# Altium PCB 0084 - AR Display Board Rev2.1.PcbDoc (part 3 of 3)
Units mm, origin at the board's own origin, x right, y up, seen from the top; angles counter-clockwise.
Board outline 127.7 x 27.2 mm, 4 copper layers (L1-TOP, L2-GND, L3-GND, L4-BOT), stack 1.571 mm thick; 141 components, 141 nets, 671 pads, 447 vias.
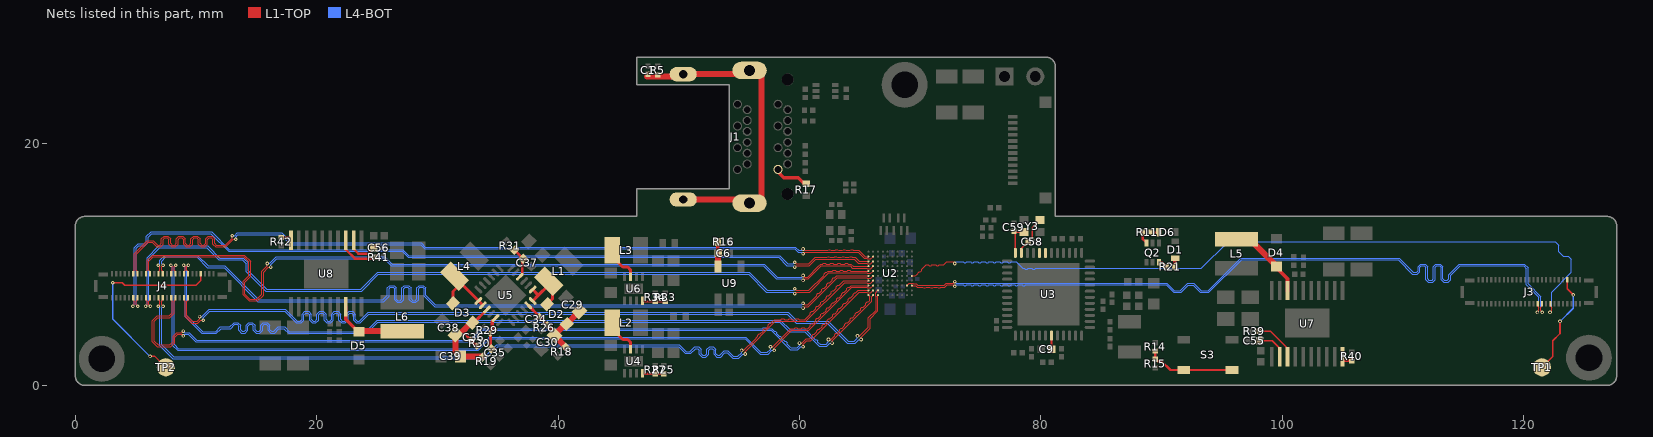
[diagram p5: the nets of this part, all layers, seen from the top]

## Via types
v1: diameter 0.3, hole 0.15, L1-TOP to L4-BOT, tented both sides, 445 vias
v2: diameter 0.25, hole 0.1, L1-TOP to L4-BOT, tented both sides, 2 vias

## Nets (pads, with @x,y where several pads share a name; then routed paths per layer and width w, separated by ;. In a path a pad name is that pad's centre, name@x,y a point inside that pad or via, vN(x,y) a via of type N, cw(c..) or ccw(c..) an arc to the next point about the centre after c; other vN are vias at no path point) (continued)
MIPI_DSI01_3_P: J3.35 U2.F10 | length 63.9
  L1-TOP w0.076: U2.F10@69.3,9.075 69.591,9.075 69.698,9.183 69.914,9.398 70.022,9.398 70.129,9.506 70.129,9.614 70.345,9.829 70.516,10 70.668,10 70.744,9.924 70.897,9.924 70.973,10 71.278,10 71.354,9.924 71.506,9.924 71.582,10 71.8,10 71.96,10 72.184,10.224 72.736,10.224 v1(72.86,10.1) ; v1@122.187,6.05 v1(122.175,6.05) 122.299,6.174 122.299,6.476 122.2,6.575 J3.35@122.2,6.75
  L4-BOT w0.076: v1(72.86,10.1) 72.984,10.224 73.1,10.224 73.252,10.224 73.557,10.224 73.633,10.148 73.786,10.148 73.862,10.224 74.167,10.224 74.243,10.148 74.395,10.148 74.472,10.224 74.776,10.224 74.853,10.148 75.005,10.148 75.081,10.224 75.386,10.224 75.462,10.148 75.615,10.148 75.691,10.224 75.996,10.224 76.072,10.148 76.224,10.148 76.3,10.224 76.605,10.224 76.681,10.148 76.834,10.148 76.91,10.224 77.215,10.224 77.291,10.148 77.443,10.148 77.52,10.224 77.824,10.224 77.961,10.224 78.484,9.7 78.637,9.7 78.713,9.624 78.865,9.624 78.942,9.7 79.246,9.7 79.323,9.624 79.475,9.624 79.551,9.7 79.6,9.7 93.3,9.7 95.5,11.9 122.6,11.9 122.9,11.6 122.9,11.084 123.284,10.7 123.684,10.7 123.948,10.437 123.948,9.376 122.299,7.727 122.299,6.174 v1(122.175,6.05)
MIPI_DSI01_C_N: J3.31 U2.H9 | length 64
  L1-TOP w0.076: U2.H9@68.9,8.275 69.1,8.475 69.383,8.475 69.43,8.427 69.673,8.427 69.8,8.3 71.984,8.3 72.161,8.476 72.736,8.476 v1(72.86,8.6) ; J3.31@121.5,6.75 121.5,6.575 121.401,6.476 121.401,6.174 v1(121.525,6.05) v1@121.513,6.05
  L4-BOT w0.076: v1(72.86,8.6) 72.984,8.476 90.439,8.476 91.063,7.852 91.552,7.852 92.152,8.452 92.663,8.452 93.263,7.852 93.852,7.852 96.552,10.552 109.663,10.552 ; 109.678,10.552 109.663,10.552 ; v1(121.525,6.05) 121.401,6.174 121.401,7.35 120.351,8.4 120.351,9.739 120.041,10.05 114.657,10.05 113.781,9.174 113.781,8.824 113.667,8.71 113.413,8.71 113.299,8.824 113.299,9.841 113.095,10.045 112.715,10.045 112.511,9.841 112.511,8.824 112.397,8.71 112.143,8.71 112.029,8.824 112.029,9.841 111.825,10.045 111.445,10.045 111.241,9.841 111.241,9.492 111.127,9.377 110.838,9.377 109.663,10.552
MIPI_DSI01_C_P: J3.29 U2.H10 | length 63.9
  L1-TOP w0.076: U2.H10@69.3,8.275 69.609,8.275 69.737,8.148 69.889,8.148 70.194,8.148 70.27,8.071 70.423,8.071 70.499,8.148 70.804,8.148 70.88,8.071 71.032,8.071 71.108,8.148 71.413,8.148 71.489,8.071 71.642,8.071 71.718,8.148 72.023,8.148 72.048,8.148 72.224,8.324 72.736,8.324 v1(72.86,8.2) ; v1@121.137,6.05 v1(121.125,6.05) 121.249,6.174 121.249,6.476 121.15,6.575 J3.29@121.15,6.75
  L4-BOT w0.076: v1(72.86,8.2) 72.984,8.324 73.1,8.324 73.252,8.324 73.557,8.324 73.633,8.248 73.786,8.248 73.862,8.324 74.167,8.324 74.243,8.248 74.395,8.248 74.472,8.324 74.776,8.324 74.853,8.248 75.005,8.248 75.081,8.324 75.386,8.324 75.462,8.248 75.615,8.248 75.691,8.324 75.996,8.324 76.072,8.248 76.224,8.248 76.3,8.324 76.605,8.324 76.681,8.248 76.834,8.248 76.91,8.324 77.215,8.324 77.291,8.248 77.443,8.248 77.52,8.324 77.824,8.324 77.901,8.248 78.053,8.248 78.129,8.324 78.434,8.324 78.51,8.248 78.663,8.248 78.739,8.324 90.376,8.324 91,7.7 91.616,7.7 92.216,8.3 92.6,8.3 93.2,7.7 93.916,7.7 96.616,10.4 109.6,10.4 110.775,9.225 111.19,9.225 111.394,9.428 111.394,9.778 111.508,9.892 111.762,9.892 111.876,9.778 111.876,8.761 112.08,8.558 112.46,8.558 112.664,8.761 112.664,9.778 112.778,9.892 113.032,9.892 113.146,9.778 113.146,8.761 113.35,8.558 113.73,8.558 113.934,8.761 113.934,9.111 114.72,9.898 119.977,9.898 120.199,9.676 120.199,8.337 121.249,7.287 121.249,6.174 v1(121.125,6.05)
MIPI_DSI10_0_N: J4.11 U2.C1 | length 69.1
  L1-TOP w0.076: v1@4.787,6.55 v1(4.775,6.55) 4.899,6.674 4.899,6.976 4.8,7.075 J4.11@4.8,7.25 ; v1(59.6,10.2) 59.724,10.076 60.761,10.076 61.284,10.6 62.1,10.6 62.252,10.6 62.329,10.676 62.481,10.676 62.557,10.6 62.862,10.6 62.938,10.676 63.091,10.676 63.167,10.6 63.472,10.6 63.548,10.676 63.7,10.676 63.776,10.6 64.081,10.6 64.157,10.676 64.31,10.676 64.386,10.6 64.616,10.6 64.941,10.275 U2.C1@65.7,10.275
  L4-BOT w0.076: v1(4.775,6.55) 4.899,6.674 4.899,11.414 5.212,11.727 5.712,11.727 5.898,11.913 5.898,12.338 6.287,12.727 11.288,12.727 12.763,11.252 27.138,11.252 27.638,10.752 58.348,10.752 59.024,10.076 59.476,10.076 v1(59.6,10.2)
MIPI_DSI10_0_P: J4.13 U2.C2 | length 69.1
  L1-TOP w0.076: J4.13@5.15,7.25 5.15,7.075 5.051,6.976 5.051,6.674 v1(5.175,6.55) v1@5.163,6.55 ; v1(59.6,9.8) 59.724,9.924 60.824,9.924 61.348,10.448 64.552,10.448 64.877,10.123 65.57,10.123 65.617,10.075 65.9,10.075 U2.C2@66.1,10.275
  L4-BOT w0.076: v1(5.175,6.55) 5.051,6.674 5.051,11.351 5.275,11.575 5.775,11.575 6.05,11.85 6.05,12.275 6.35,12.575 11.225,12.575 12.7,11.1 27.075,11.1 27.575,10.6 58.284,10.6 58.961,9.924 59.476,9.924 v1(59.6,9.8)
MIPI_DSI10_1_N: J4.17 U2.E1 | length 69.1
  L1-TOP w0.076: v1@5.837,6.55 v1(5.825,6.55) 5.949,6.674 5.949,6.976 5.85,7.075 J4.17@5.85,7.25 ; v1(59.6,8) 59.724,7.876 60.776,7.876 62,9.1 62.052,9.152 62.052,9.259 62.159,9.367 62.267,9.367 62.375,9.475 62.414,9.475 62.719,9.475 62.795,9.551 62.947,9.551 63.024,9.475 63.328,9.475 63.405,9.551 63.557,9.551 63.633,9.475 63.938,9.475 64.014,9.551 64.167,9.551 64.243,9.475 64.548,9.475 64.7,9.475 U2.E1@65.7,9.475
  L4-BOT w0.076: v1(5.825,6.55) 5.949,6.674 5.949,10.564 6.937,11.552 10.963,11.552 11.963,10.552 13.913,10.552 14.325,10.141 14.325,9.491 15.863,7.952 23.652,7.952 25.052,9.352 55.848,9.352 57.324,7.876 59.476,7.876 v1(59.6,8)
MIPI_DSI10_1_P: J4.19 U2.E2 | length 69.1
  L1-TOP w0.076: J4.19@6.2,7.25 6.2,7.075 6.101,6.976 6.101,6.674 v1(6.225,6.55) v1@6.213,6.55 ; v1(59.6,7.6) 59.724,7.724 60.839,7.724 62.438,9.323 65.57,9.323 65.617,9.275 65.9,9.275 U2.E2@66.1,9.475
  L4-BOT w0.076: v1(6.225,6.55) 6.101,6.674 6.101,10.501 7,11.4 10.9,11.4 11.9,10.4 13.85,10.4 14.173,10.077 14.173,9.427 15.8,7.8 23.716,7.8 25.116,9.2 55.784,9.2 57.261,7.724 59.476,7.724 v1(59.6,7.6)
MIPI_DSI10_2_N: J4.24 U2.F1 | length 69.1
  L1-TOP w0.076: v1@6.887,9.95 v1(6.875,9.95) 6.999,9.826 6.999,9.524 6.9,9.425 J4.24@6.9,9.25 ; v1(60.3,6.8) 60.424,6.676 60.676,6.676 61.3,7.3 61.408,7.408 61.408,7.516 61.516,7.623 61.623,7.623 61.839,7.839 61.839,7.947 61.947,8.054 62.054,8.054 62.27,8.27 62.27,8.378 62.378,8.485 62.485,8.485 62.701,8.701 62.701,8.809 62.809,8.916 62.916,8.916 63,9 63.075,9.075 U2.F1@65.7,9.075
  L4-BOT w0.076: v1(6.875,9.95) 6.999,10.074 6.999,10.363 7.436,10.8 10.116,10.8 11.016,9.9 12.4,9.9 15.2,7.1 25.485,7.1 25.848,7.462 25.848,8.073 26.049,8.275 26.408,8.275 26.61,8.073 26.61,7.14 26.725,7.025 26.933,7.025 27.067,7.159 27.067,8.073 27.269,8.275 27.627,8.275 27.829,8.073 27.829,7.167 27.971,7.025 28.152,7.025 28.286,7.159 28.286,8.073 28.488,8.275 28.847,8.275 29.048,8.073 29.048,7.462 29.834,6.676 60.176,6.676 v1(60.3,6.8)
MIPI_DSI10_2_P: J4.26 U2.F2 | length 69.1
  L1-TOP w0.076: J4.26@7.25,9.25 7.25,9.425 7.151,9.524 7.151,9.826 v1(7.275,9.95) v1@7.263,9.95 ; v1(60.3,6.4) 60.424,6.524 60.739,6.524 63.138,8.923 65.57,8.923 65.617,8.875 65.9,8.875 U2.F2@66.1,9.075
  L4-BOT w0.076: v1(7.275,9.95) 7.151,10.074 7.151,10.3 7.499,10.648 10.052,10.648 10.952,9.748 12.337,9.748 15.137,6.948 25.549,6.948 26,7.399 26,8.01 26.113,8.123 26.345,8.123 26.457,8.01 26.457,7.077 26.662,6.872 26.996,6.872 27.219,7.096 27.219,8.01 27.332,8.123 27.564,8.123 27.677,8.01 27.677,7.104 27.908,6.872 28.215,6.872 28.439,7.096 28.439,8.01 28.551,8.123 28.783,8.123 28.896,8.01 28.896,7.399 29.771,6.524 60.176,6.524 v1(60.3,6.4)
MIPI_DSI10_3_N: J4.12 U2.B1 | length 69.1
  L1-TOP w0.076: J4.12@4.8,9.25 4.8,9.425 4.899,9.524 4.899,10.914 5.984,12 6.447,12 6.823,11.624 7.004,11.624 7.142,11.762 7.142,12.148 7.37,12.376 7.677,12.376 7.904,12.148 7.904,11.762 8.042,11.624 8.223,11.624 8.361,11.762 8.361,12.148 8.589,12.376 8.896,12.376 9.123,12.148 9.123,11.762 9.262,11.624 9.442,11.624 9.581,11.762 9.581,12.148 9.808,12.376 10.115,12.376 10.343,12.148 10.343,11.762 10.481,11.624 10.662,11.624 10.8,11.762 10.8,12.148 11.027,12.376 11.334,12.376 11.562,12.148 11.562,11.762 11.7,11.624 12.416,11.624 13,12.208 v1(13,12.4) ; v1(60.3,11.3) 60.424,11.176 62.1,11.176 62.333,11.176 62.409,11.252 62.562,11.252 62.638,11.176 62.943,11.176 63.019,11.252 63.171,11.252 63.247,11.176 63.552,11.176 63.628,11.252 63.781,11.252 63.857,11.176 64.162,11.176 64.238,11.252 64.39,11.252 64.467,11.176 64.771,11.176 64.924,11.176 65.425,10.675 U2.B1@65.7,10.675
  L4-BOT w0.076: v1(13,12.4) 13.192,12.4 13.417,12.625 17.091,12.625 17.916,11.8 28.666,11.8 29.013,11.452 59.663,11.452 59.939,11.176 60.176,11.176 v1(60.3,11.3)
MIPI_DSI10_3_P: J4.14 U2.B2 | length 69.1
  L1-TOP w0.076: J4.14@5.15,9.25 5.15,9.425 5.051,9.524 5.051,10.851 6.048,11.848 6.384,11.848 6.76,11.472 7.067,11.472 7.295,11.699 7.295,12.085 7.433,12.224 7.614,12.224 7.752,12.085 7.752,11.699 7.979,11.472 8.286,11.472 8.514,11.699 8.514,12.085 8.652,12.224 8.833,12.224 8.971,12.085 8.971,11.699 9.199,11.472 9.505,11.472 9.733,11.699 9.733,12.085 9.871,12.224 10.052,12.224 10.19,12.085 10.19,11.699 10.418,11.472 10.725,11.472 10.952,11.699 10.952,12.085 11.09,12.224 11.271,12.224 11.409,12.085 11.409,11.699 11.637,11.472 12.479,11.472 13.108,12.1 v1(13.3,12.1) ; v1(60.3,10.9) 60.424,11.024 64.861,11.024 65.362,10.523 65.57,10.523 65.617,10.475 65.9,10.475 U2.B2@66.1,10.675
  L4-BOT w0.076: v1(13.3,12.1) 13.3,12.292 13.48,12.473 17.027,12.473 17.852,11.648 28.602,11.648 28.95,11.3 59.6,11.3 59.876,11.024 60.176,11.024 v1(60.3,10.9)
MIPI_DSI10_C_N: J4.18 U2.D1 | length 69.1
  L1-TOP w0.076: J4.18@5.85,9.25 5.85,9.425 5.949,9.524 5.949,10.349 6.4,10.8 14.016,10.8 14.525,10.291 14.525,9.025 14.052,8.552 14.052,7.563 14.463,7.152 15.052,7.152 15.448,7.548 15.448,9.455 15.9,9.908 v1(15.9,10.1) ; v1(60.3,9.1) 60.424,8.976 60.676,8.976 61.6,9.9 61.708,10.008 61.752,10.052 61.905,10.052 61.981,10.129 62.133,10.129 62.21,10.052 62.514,10.052 62.591,10.129 62.743,10.129 62.819,10.052 63.124,10.052 63.2,10.129 63.353,10.129 63.429,10.052 63.734,10.052 63.81,10.129 63.962,10.129 64.038,10.052 64.2,10.052 64.263,10.052 64.441,9.875 U2.D1@65.7,9.875
  L4-BOT w0.076: v1(15.9,10.1) 16.092,10.1 16.645,10.652 25.648,10.652 26.248,10.052 57.063,10.052 58.139,8.976 60.176,8.976 v1(60.3,9.1)
MIPI_DSI10_C_P: J4.20 U2.D2 | length 69.1
  L1-TOP w0.076: J4.20@6.2,9.25 6.2,9.425 6.101,9.524 6.101,10.286 6.463,10.648 13.952,10.648 14.373,10.227 14.373,9.088 13.9,8.616 13.9,7.5 14.4,7 15.116,7 15.6,7.484 15.6,9.392 16.008,9.8 v1(16.2,9.8) ; v1(60.3,8.7) 60.424,8.824 60.739,8.824 61.816,9.9 64.2,9.9 64.377,9.723 65.57,9.723 65.617,9.675 65.9,9.675 U2.D2@66.1,9.875
  L4-BOT w0.076: v1(16.2,9.8) 16.2,9.992 16.708,10.5 25.584,10.5 26.184,9.9 57,9.9 58.076,8.824 60.176,8.824 v1(60.3,8.7)
MIPI_DSI11_0_N: J4.38 U2.K1 | length 69.1
  L1-TOP w0.076: J4.38@9.35,9.25 9.35,9.425 9.251,9.524 9.251,9.826 v1(9.375,9.95) v1@9.363,9.95 ; v1(62.4,3.8) 62.592,3.8 62.792,4 62.9,4.108 62.9,4.216 63.008,4.323 63.116,4.323 63.331,4.539 63.331,4.647 63.439,4.754 63.547,4.754 63.762,4.97 63.762,5.078 63.87,5.185 63.978,5.185 64.193,5.401 64.193,5.509 64.301,5.616 64.409,5.616 64.624,5.832 64.624,5.94 64.732,6.047 64.84,6.047 65.055,6.263 65.055,6.371 65.163,6.479 65.271,6.479 65.486,6.694 65.486,6.802 65.594,6.91 65.702,6.91 65.8,7.008 65.824,7.032 65.824,7.351 U2.K1@65.7,7.475
  L4-BOT w0.076: v1(9.375,9.95) 9.251,9.826 9.251,5.749 10.548,4.452 11.637,4.452 12.029,4.845 12.8,4.845 13.156,5.201 13.463,5.201 13.691,4.973 13.691,4.627 13.829,4.488 14.01,4.488 14.148,4.627 14.148,4.973 14.375,5.201 14.682,5.201 14.91,4.973 14.91,4.627 15.048,4.488 15.229,4.488 15.367,4.627 15.367,4.973 15.595,5.201 15.901,5.201 16.129,4.973 16.129,4.627 16.267,4.488 16.448,4.488 16.804,4.845 17.355,4.845 17.748,4.452 24.052,4.452 25,5.4 58.416,5.4 59.216,4.6 60.5,4.6 61.308,3.792 61.416,3.792 61.523,3.684 61.523,3.577 61.696,3.404 62.196,3.404 62.4,3.608 v1(62.4,3.8)
MIPI_DSI11_0_P: J4.36 U2.K2 | length 69.1
  L1-TOP w0.076: v1@8.987,9.95 v1(8.975,9.95) 9.099,9.826 9.099,9.524 9,9.425 J4.36@9,9.25 ; v1(62.7,3.5) 62.7,3.692 65.976,6.968 65.976,7.351 U2.K2@66.1,7.475
  L4-BOT w0.076: v1(8.975,9.95) 9.099,9.826 9.099,5.686 10.484,4.3 11.7,4.3 12.092,4.692 12.863,4.692 13.219,5.049 13.4,5.049 13.538,4.91 13.538,4.563 13.766,4.336 14.073,4.336 14.3,4.563 14.3,4.91 14.438,5.049 14.619,5.049 14.757,4.91 14.757,4.563 14.985,4.336 15.292,4.336 15.519,4.563 15.519,4.91 15.658,5.049 15.838,5.049 15.977,4.91 15.977,4.563 16.204,4.336 16.511,4.336 16.867,4.692 17.292,4.692 17.684,4.3 24.116,4.3 25.063,5.248 58.352,5.248 59.152,4.448 60.437,4.448 61.633,3.251 62.259,3.251 62.508,3.5 v1(62.7,3.5)
MIPI_DSI11_1_N: J4.32 U2.H1 | length 69.1
  L1-TOP w0.076: J4.32@8.3,9.25 8.3,9.425 8.201,9.524 8.201,9.826 v1(8.325,9.95) v1@8.313,9.95 ; v1(57.6,3.2) 57.792,3.2 59.292,4.7 59.4,4.7 59.552,4.7 59.629,4.776 59.781,4.776 59.857,4.7 60.162,4.7 60.238,4.776 60.391,4.776 60.467,4.7 60.6,4.7 60.7,4.7 60.8,4.8 60.908,4.908 60.908,5.016 61.016,5.123 61.123,5.123 61.339,5.339 61.339,5.447 61.447,5.554 61.554,5.554 61.77,5.77 61.77,5.878 61.878,5.985 61.985,5.985 62.201,6.201 62.201,6.309 62.309,6.416 62.416,6.416 62.632,6.632 62.632,6.74 62.74,6.847 62.847,6.847 63.063,7.063 63.063,7.171 63.171,7.279 63.279,7.279 63.494,7.494 63.494,7.602 63.602,7.71 63.71,7.71 63.925,7.925 63.925,8.033 64.033,8.141 64.141,8.141 64.275,8.275 64.427,8.275 ; 64.3,8.275 64.427,8.275 ; U2.H1@65.7,8.275 64.427,8.275
  L4-BOT w0.076: v1(8.325,9.95) 8.201,9.826 8.201,9.537 8.2,9.536 8.2,3.4 8.548,3.052 33.337,3.052 34.284,4 55.55,4 56.8,2.75 57.342,2.75 57.6,3.008 v1(57.6,3.2)
MIPI_DSI11_1_P: J4.30 U2.H2 | length 69.1
  L1-TOP w0.076: v1@7.937,9.95 v1(7.925,9.95) 8.049,9.826 8.049,9.524 7.95,9.425 J4.30@7.95,9.25 ; v1(57.9,2.9) 57.9,3.092 59.355,4.548 60.763,4.548 64.338,8.123 65.57,8.123 65.617,8.075 65.9,8.075 U2.H2@66.1,8.275
  L4-BOT w0.076: v1(7.925,9.95) 8.049,9.826 8.049,9.6 8.048,9.599 8.048,3.337 8.484,2.9 33.4,2.9 34.348,3.848 55.487,3.848 56.737,2.598 57.405,2.598 57.708,2.9 v1(57.9,2.9)
MIPI_DSI11_2_N: J4.25 U2.G1 | length 69.1
  L1-TOP w0.076: J4.25@7.25,7.25 7.25,7.075 7.151,6.976 7.151,6.674 v1(7.275,6.55) v1@7.263,6.55 ; v1(55.2,2.9) 55.392,2.9 56.292,3.8 56.544,4.051 56.544,4.159 56.651,4.267 56.759,4.267 56.975,4.483 56.975,4.59 57.083,4.698 57.19,4.698 57.406,4.914 57.406,5.021 57.514,5.129 57.621,5.129 57.837,5.345 57.945,5.452 58.3,5.452 58.452,5.452 58.529,5.529 58.681,5.529 58.757,5.452 59.062,5.452 59.138,5.529 59.291,5.529 59.367,5.452 59.672,5.452 59.748,5.529 59.9,5.529 59.976,5.452 60.2,5.452 60.452,5.452 60.7,5.7 60.906,5.906 60.906,6.014 61.014,6.121 61.121,6.121 61.337,6.337 61.337,6.445 61.445,6.552 61.553,6.552 61.768,6.768 61.768,6.876 61.876,6.984 61.984,6.984 62.199,7.199 62.199,7.307 62.307,7.415 62.415,7.415 62.63,7.63 62.63,7.738 62.738,7.846 62.846,7.846 63.061,8.061 63.061,8.169 63.169,8.277 63.277,8.277 63.492,8.492 63.6,8.6 63.675,8.675 U2.G1@65.7,8.675
  L4-BOT w0.076: v1(7.275,6.55) 7.151,6.426 7.151,3.349 8.148,2.352 33.937,2.352 34.937,3.352 50.048,3.352 50.6,2.8 50.918,2.8 51.325,3.207 51.632,3.207 51.86,2.979 51.86,2.636 51.998,2.498 52.179,2.498 52.317,2.636 52.317,2.979 52.545,3.207 52.852,3.207 53.079,2.979 53.079,2.636 53.217,2.498 53.398,2.498 53.753,2.852 54.063,2.852 54.516,2.4 54.892,2.4 55.2,2.708 v1(55.2,2.9)
MIPI_DSI11_2_P: J4.23 U2.G2 | length 69.1
  L1-TOP w0.076: v1@6.887,6.55 v1(6.875,6.55) 6.999,6.674 6.999,6.976 6.9,7.075 J4.23@6.9,7.25 ; v1(55.5,2.6) 55.5,2.792 58.008,5.3 60.516,5.3 63.738,8.523 65.57,8.523 65.617,8.475 65.9,8.475 U2.G2@66.1,8.675
  L4-BOT w0.076: v1(6.875,6.55) 6.999,6.426 6.999,3.286 8.084,2.2 34,2.2 35,3.2 49.984,3.2 50.537,2.648 50.982,2.648 51.389,3.055 51.569,3.055 51.707,2.916 51.707,2.573 51.935,2.345 52.242,2.345 52.469,2.573 52.469,2.916 52.608,3.055 52.788,3.055 52.927,2.916 52.927,2.573 53.154,2.345 53.461,2.345 53.816,2.7 54,2.7 54.452,2.248 54.955,2.248 55.308,2.6 v1(55.5,2.6)
MIPI_DSI11_3_N: J4.37 U2.J3 | length 69.1
  L1-TOP w0.076: J4.37@9.35,7.25 9.35,7.075 9.251,6.976 9.251,5.749 9.7,5.3 10.092,5.3 10.3,5.508 v1(10.3,5.7) ; v1(64.8,4.1) 64.992,4.1 65.696,4.804 65.696,5.596 66.344,6.244 66.344,7.348 66.3,7.392 66.3,7.675 U2.J3@66.5,7.875
  L4-BOT w0.076: v1(10.3,5.7) 10.492,5.7 11.092,6.3 17.4,6.3 18.374,5.326 18.658,5.326 18.796,5.464 18.796,5.897 19.024,6.124 19.331,6.124 19.558,5.897 19.558,5.464 19.697,5.326 19.877,5.326 20.016,5.464 20.016,5.897 20.243,6.124 20.55,6.124 20.778,5.897 20.778,5.464 20.916,5.326 21.096,5.326 21.235,5.464 21.235,5.897 21.462,6.124 21.769,6.124 21.997,5.897 21.997,5.464 22.135,5.326 22.316,5.326 22.454,5.464 22.454,5.897 22.681,6.124 22.988,6.124 23.216,5.897 23.216,5.464 23.354,5.326 23.535,5.326 24.262,6.052 59.048,6.052 59.8,5.3 62.375,5.3 64.025,3.65 64.542,3.65 64.8,3.908 v1(64.8,4.1)
MIPI_DSI11_3_P: J4.35 U2.K3 | length 69.1
  L1-TOP w0.076: J4.35@9,7.25 9,7.075 9.099,6.976 9.099,5.686 9.637,5.148 10.155,5.148 10.408,5.4 v1(10.6,5.4) ; v1(65.1,3.8) 65.1,3.992 65.849,4.741 65.849,5.533 66.5,6.184 U2.K3@66.5,7.475
  L4-BOT w0.076: v1(10.6,5.4) 10.6,5.592 11.155,6.148 17.337,6.148 18.311,5.173 18.721,5.173 18.949,5.401 18.949,5.834 19.087,5.972 19.268,5.972 19.406,5.834 19.406,5.401 19.633,5.173 19.94,5.173 20.168,5.401 20.168,5.834 20.306,5.972 20.487,5.972 20.625,5.834 20.625,5.401 20.853,5.173 21.16,5.173 21.387,5.401 21.387,5.834 21.525,5.972 21.706,5.972 21.844,5.834 21.844,5.401 22.072,5.173 22.379,5.173 22.606,5.401 22.606,5.834 22.745,5.972 22.925,5.972 23.064,5.834 23.064,5.401 23.291,5.173 23.598,5.173 24.325,5.9 58.984,5.9 59.737,5.148 62.312,5.148 63.962,3.498 64.605,3.498 64.908,3.8 v1(65.1,3.8)
MIPI_DSI11_C_N: J4.31 U2.J1 | length 69.1
  L1-TOP w0.076: J4.31@8.3,7.25 8.3,7.075 8.201,6.976 8.201,5.961 7.841,5.6 6.85,5.6 6.55,5.3 6.55,3.666 6.863,3.352 7.837,3.352 8.1,3.616 8.1,4.063 8.413,4.376 8.826,4.376 v1(8.95,4.5) ; v1(60,3.5) 60.192,3.5 60.545,3.852 60.852,3.852 60.9,3.9 61.008,4.008 61.008,4.108 61.123,4.223 61.223,4.223 61.439,4.439 61.439,4.539 61.554,4.654 61.654,4.654 61.87,4.87 61.87,4.97 61.985,5.085 62.085,5.085 62.301,5.301 62.301,5.401 62.416,5.516 62.516,5.516 62.732,5.732 62.732,5.833 62.847,5.947 62.947,5.947 63.163,6.163 63.163,6.264 63.278,6.379 63.379,6.379 63.594,6.594 63.594,6.695 63.709,6.81 63.81,6.81 64.025,7.025 64.025,7.126 64.14,7.241 64.241,7.241 64.456,7.456 64.456,7.557 64.571,7.672 64.672,7.672 64.8,7.8 64.875,7.875 U2.J1@65.7,7.875
  L4-BOT w0.076: v1(8.95,4.5) 9.074,4.376 9.424,4.376 10.048,3.752 32.721,3.752 33.669,4.7 56.938,4.7 57.006,4.768 57.175,4.768 57.243,4.7 57.548,4.7 57.7,4.7 57.895,4.505 57.991,4.505 58.111,4.386 58.111,4.289 58.326,4.074 58.423,4.074 58.542,3.954 58.542,3.858 58.757,3.643 58.854,3.643 58.973,3.523 58.973,3.427 59.188,3.212 59.296,3.104 59.796,3.104 60,3.308 v1(60,3.5)
MIPI_DSI11_C_P: J4.29 U2.J2 | length 69.1
  L1-TOP w0.076: J4.29@7.95,7.25 7.95,7.075 8.049,6.976 8.049,6.024 7.777,5.752 6.787,5.752 6.398,5.363 6.398,3.602 6.8,3.2 7.9,3.2 8.252,3.552 8.252,4 8.476,4.224 8.826,4.224 v1(8.95,4.1) ; v1(60.3,3.2) 60.3,3.392 60.608,3.7 60.916,3.7 64.938,7.723 65.57,7.723 65.617,7.675 65.9,7.675 U2.J2@66.1,7.875
  L4-BOT w0.076: v1(8.95,4.1) 9.074,4.224 9.361,4.224 9.984,3.6 32.784,3.6 33.732,4.548 57.637,4.548 59.233,2.951 59.859,2.951 60.108,3.2 v1(60.3,3.2)
NetC1_2: C1.2 J1.0 R5.2 | length 27.3
  L1-TOP w0.5: C1.2@47.36,25.6 50.175,25.6 J1.0@50.365,25.79 55.565,25.79 J1.0@55.865,26.09 56.86,26.09 56.86,15.1 J1.0@55.865,15.1 55.565,15.4 J1.0@50.365,15.4
NetC6_1: C6.1 R16.1 U9.5 | length 2.2
  L1-TOP w0.3: R16.1@53.225,11.89 53.225,10.95 C6.1@53.25,10.925 ; C6.1@53.275,10.95 C6.1@53.325,11
  L1-TOP w0.5: U9.5@53.25,9.85 53.25,10.925 C6.1@53.275,10.95
NetC35_1: C35.1 R29.1 U5.17 | length 2.8
  L1-TOP w0.25: R29.1@34.35,4.425 34.544,4.619 34.544,5.306 U5.17@34.813,5.575 ; R29.1@34.444,4.372 R29.1@34.392,4.319 34.4,4.311 34.4,3.1 C35.1@34.482,3.018
NetC37_2: C37.2 R31.2 U5.4 | length 2.7
  L1-TOP w0.1: C37.2@37.126,10.485 C37.2@37.144,10.467
  L1-TOP w0.2: R31.2@36.398,11.213 C37.2@37.126,10.485 37.044,10.403 37.044,9.22 U5.4@36.829,9.004
NetC55_1: C55.1 U7.2 | length 3.5
  L1-TOP w0.15: C55.1@98.11,3.5 C55.1@98.21,3.6 ; C55.1@98.11,3.7 99.16,3.7 U7.2@99.779,3.081 ; U7.2@99.779,3.081 U7.2@99.779,2.365 U7.2@99.779,3.081
NetC56_1: C56.1 U8.2 | length 2.7
  L1-TOP w0.2: U8.2@23.068,12.016 23.068,11.292 23.46,10.9 24.21,10.9 C56.1@24.71,11.4
NetC58_1: C58.1 U3.23 Y3.3 | length 3.4
  L1-TOP w0.127: U3.23@78.375,10.975 78.375,11.345 C58.1@78.93,11.9 79.26,12.23 79.26,13.05 Y3.3@79.91,13.7
NetC59_1: C59.1 U3.24 Y3.1 | length 2.7
  L1-TOP w0.1: C59.1@77.76,12.77 77.83,12.7 C59.1@77.875,12.655 ; Y3.1@78.54,12.77 Y3.1@78.61,12.7
  L1-TOP w0.127: C59.1@77.83,12.7 Y3.1@78.61,12.7 ; U3.24@77.875,10.975 C59.1@77.875,12.655
NetD1_K: D1.K R21.1 | length 0.7
  L1-TOP w0.3: R21.1@91.075,9.825 D1.K@91.075,10.525
NetD2_A: D2.A L1.2 U5.1 U5.24 | length 5.5
  L1-TOP w0.1: L1.2@39.22,8.32 L1.2@39.22,8.643 L1.2@39.544,8.319 ; L1.2@39.644,8.219 L1.2@39.944,7.919
  L1-TOP w0.25: U5.24@37.889,6.989 38.367,7.467 ; U5.1@37.889,7.944 38.367,7.467 ; D2.A@39.144,6.767 39.544,7.167 L1.2@39.544,8.319 ; L1.2@39.22,8.32 38.367,7.467
NetD3_K: D3.K L4.1 U5.13 U5.14 | length 6.5
  L1-TOP w0.25: D3.K@31.144,6.875 D3.K@31.366,6.653 ; D3.K@31.287,6.813 31.287,7.787 31.944,8.444 L4.1@31.844,8.544 ; L4.1@31.383,9.005 L4.1@31.844,8.544 ; L4.1@31.42,8.99 L4.1@31.844,8.567 ; L4.1@31.844,8.467 L4.1@31.844,8.544 ; L4.1@31.844,8.619 L4.1@31.844,8.567 ; U5.14@33.753,6.636 33.753,6.658 L4.1@31.844,8.567 ; L4.1@31.844,8.544 L4.1@31.844,8.567
  L1-TOP w0.5: L4.1@31.42,8.99 L4.1@31.42,9.043
NetD6_K: D6.K R11.1 | length 0.6
  L1-TOP w0.15: R11.1@89.15,12.675 D6.K@89.75,12.675
NetJ1_20: J1.20 R17.1 | length 2.8
  L1-TOP w0.3: J1.20@58.215,17.69 58.705,17.2 59.9,17.2 60.4,16.7 R17.1@60.56,16.7
NetL2_1: L2.1 U4.7 | length 3.8
  L1-TOP w0.1: L2.1@44.295,4.71 L2.1@44.295,5.2
  L1-TOP w0.25: L2.1@44.195,5.2 44.295,5.2 44.395,5.2 44.395,4.765 45.36,3.8 45.76,3.8 46.01,3.55 U4.7@46.01,2.995
NetL3_1: L3.1 U6.7 | length 3.1
  L1-TOP w0.25: L3.1@44.495,11.2 44.495,10.665 45.36,9.8 45.76,9.8 46.01,9.55 U6.7@46.01,8.995
NetQ2_3: Q2.3 R11.2 | length 1
  L1-TOP w0.2: R11.2@88.45,12.675 88.45,12.11 Q2.3@88.76,11.8
NetQ2_6: Q2.6 R21.2 | length 0.8
  L1-TOP w0.2: Q2.6@89.76,10.175 90.025,10.175 R21.2@90.375,9.825
NetR14_1: R14.1 R15.1 S3.2 | length 7.4
  L1-TOP w0.2: R14.1@89.46,2.85 R15.1@89.46,2.15 89.51,2.15 89.66,2 90,2 90.725,1.275 S3.2@91.825,1.275 S3.2@95.825,1.275
NetR25_1: R25.1 R27.2 U4.4 | length 1.9
  L1-TOP w0.1: U4.4@47.01,0.9 U4.4@47.01,1.005
  L1-TOP w0.2: U4.4@47.01,1.005 47.065,0.95 R27.2@48.06,0.95 R25.1@48.76,0.95
NetR33_1: R33.1 R34.2 U6.4 | length 1.9
  L1-TOP w0.2: U6.4@47.01,6.95 R34.2@48.06,6.95 R33.1@48.86,6.95
  L1-TOP w0.25: U6.4@47.01,6.95 U6.4@47.01,7.005
NetR39_2: R39.2 U7.3 | length 5
  L1-TOP w0.125: U7.3@100.429,1.704 U7.3@100.429,2.365
  L1-TOP w0.127: R39.2@98.01,4.5 99,4.5 100.429,3.071 U7.3@100.429,2.365 U7.3@100.429,3.031
NetR40_2: R40.2 U7.10 | length 1.8
  L1-TOP w0.1: U7.10@104.979,2.365 U7.10@104.979,3.021
  L1-TOP w0.2: U7.10@104.979,2.365 104.979,2.05 R40.2@105.76,2.05 ; U7.10@104.979,3.021 U7.10@105.008,3.05
NetR41_2: R41.2 U8.3 | length 3.5
  L1-TOP w0.2: U8.3@22.418,12.016 22.418,11.242 23.16,10.5 24.71,10.5 R41.2@24.81,10.6
NetR42_2: R42.2 U8.10 | length 1.6
  L1-TOP w0.2: R42.2@17.06,12.25 U8.10@17.868,12.25 ; U8.10@17.818,12.2 U8.10@17.868,12.25 ; U8.10@17.868,12.016 U8.10@17.868,12.25 ; U8.10@17.868,12.7 U8.10@17.868,12.25
PB10: U3.19
PB11: U3.20
SW_L: D4.A L5.2 U7.18 | length 6.6
  L1-TOP w0.3: D4.A@99.5,9.9 99.5,9.76 100.429,8.831 U7.18@100.429,7.865
  L1-TOP w0.5: L5.2@96.2,12.1 97.3,12.1 D4.A@99.5,9.9
SW_R: D5.A L6.2 U8.18 | length 6.4
  L1-TOP w0.3: U8.18@22.418,6.516 22.418,5.482 23.45,4.45 D5.A@23.5,4.45
  L1-TOP w0.5: D5.A@23.5,4.45 23.5,4.5 L6.2@27.1,4.5 L6.2@27.1,4.25
TE_L: J3.44 TP1.0 | length 8.5
  L1-TOP w0.127: TP1.0@121.5,1.5 122.4,2.4 122.4,3.7 123,4.3 v1(123,5.3) ; J3.44@123.6,8.75 123.6,8 v1(124.1,7.5)
  L4-BOT w0.127: v1(123,5.3) 124.1,6.4 v1(124.1,7.5)
TE_R: J4.44 TP2.0 | length 17.9
  L1-TOP w0.127: v1(3.1,8.5) 3.9,8.5 4.1,8.3 10,8.3 10.4,8.7 J4.44@10.4,9.25 ; v1(6.2,2.4) 6.6,2.4 TP2.0@7.5,1.5 ; TP2.0@7.3,2 TP2.0@7.8,1.5
  L4-BOT w0.127: v1(3.1,8.5) 3.1,5.5 v1(6.2,2.4)
VDDCORE: C9.1 U3.43 | length 1.3
  L1-TOP w0.2: C9.1@80.875,2.85 U3.43@80.875,4.125
VNEG: C36.1 C38.2 C39.2 D3.A R19.1 R30.1 U5.15 | length 8.6
  L1-TOP w0.25: C38.2@31.933,4.333 32.2,4.333 C36.1@32.767,3.767 32.767,3.738 R30.1@33.253,3.253 ; D3.A@32.962,5.138 U5.15@34.106,6.282
  L1-TOP w0.5: C38.2@31.457,4.201 C38.2@31.51,4.201 31.51,2.79 C39.2@31.9,2.4 33.7,2.4 R19.1@33.746,2.354 ; C38.2@31.933,4.333 32.787,5.187 D3.A@32.913,5.187
VPOS: C29.2 C30.2 C34.1 D2.K R18.1 R26.1 U5.23 | length 7.7
  L1-TOP w0.1: C34.1@38.423,5.72 C34.1@38.423,5.748 ; R26.1@39.092,5.014 R26.1@39.092,5.051
  L1-TOP w0.25: U5.23@37.536,6.636 C34.1@38.423,5.748 ; C34.1@38.423,5.72 R26.1@39.092,5.051 ; R26.1@39.092,5.014 39.71,4.396 39.71,4.189 C30.2@39.71,4.132
  L1-TOP w0.5: C30.2@39.71,4.132 39.71,4.097 R18.1@40.654,3.154 ; C30.2@39.71,4.189 40.716,5.195 D2.K@40.716,5.241 ; D2.K@40.713,5.087 40.718,5.087 C29.2@41.766,6.134
pads on no net: J1. J2.0 Q1.1 Q1.2 Q1.6 U2.A3 U2.E9 U3.3 U3.13 U3.15 U3.16 U3.21 U3.22 U3.29 U3.33 U3.34 U3.39 U3.41 U3.47 U3.48 U4.6 U5.7 U5.12 U5.20 U6.6 U7.8 U7.19 U8.8 U8.19 U9.4

## Polygon pours and split planes (outlines as drawn)
5V on L4-BOT "BOT-5V" (solid, pour order 10): 80.8,26.6 80.8,15.6 67.4,15.6 67.4,15.9 70.9,19.4 70.9,26.6 71.2,26.9 80.5,26.9
GND on L2-GND (split plane): 80.498,26.89 80.591,26.862 80.678,26.816 80.753,26.753 80.816,26.678 80.862,26.591 80.89,26.498 80.899,26.407 80.899,26.4 80.899,14 80.904,13.941 80.921,13.885 80.949,13.833 80.987,13.787 81.033,13.749 81.085,13.722 81.141,13.704 81.2,13.699 126.9,13.699 126.907,13.699 126.998,13.69 127.091,13.662 127.178,13.616 127.253,13.553 127.316,13.478 127.362,13.391 127.39,13.298 127.399,13.207 127.399,13.2 127.399,0.8 127.399,0.793 127.39,0.703 127.362,0.609 127.316,0.522 127.253,0.447 127.178,0.384 127.091,0.338 126.998,0.31 126.907,0.301 126.9,0.301 0.8,0.301 0.793,0.301 0.702,0.31 0.609,0.338 0.522,0.384 0.447,0.447 0.384,0.522 0.338,0.609 0.31,0.702 0.301,0.793 0.301,0.8 0.301,13.2 0.301,13.207 0.31,13.298 0.338,13.391 0.384,13.478 0.447,13.553 0.522,13.616 0.609,13.662 0.702,13.69 0.793,13.699 0.8,13.699 46.5,13.699 46.559,13.704 46.615,13.722 46.667,13.749 46.713,13.787 46.751,13.833 46.779,13.885 46.796,13.941 46.801,14 46.801,15.999 54.16,15.999 54.219,16.004 54.275,16.021 54.327,16.049 54.373,16.087 54.411,16.133 54.438,16.185 54.456,16.241 54.461,16.3 54.461,24.9 54.456,24.959 54.438,25.015 54.411,25.067 54.373,25.113 54.327,25.151 54.275,25.179 54.219,25.196 54.16,25.201 46.801,25.201 46.801,26.899 80.4,26.899 80.407,26.899
GND on L3-GND (split plane): 80.498,26.89 80.591,26.862 80.678,26.816 80.753,26.753 80.816,26.678 80.862,26.591 80.89,26.498 80.899,26.407 80.899,26.4 80.899,14 80.904,13.941 80.921,13.885 80.949,13.833 80.987,13.787 81.033,13.749 81.085,13.722 81.141,13.704 81.2,13.699 126.9,13.699 126.907,13.699 126.998,13.69 127.091,13.662 127.178,13.616 127.253,13.553 127.316,13.478 127.362,13.391 127.39,13.298 127.399,13.207 127.399,13.2 127.399,0.8 127.399,0.793 127.39,0.703 127.362,0.609 127.316,0.522 127.253,0.447 127.178,0.384 127.091,0.338 126.998,0.31 126.907,0.301 126.9,0.301 0.8,0.301 0.793,0.301 0.702,0.31 0.609,0.338 0.522,0.384 0.447,0.447 0.384,0.522 0.338,0.609 0.31,0.702 0.301,0.793 0.301,0.8 0.301,13.2 0.301,13.207 0.31,13.298 0.338,13.391 0.384,13.478 0.447,13.553 0.522,13.616 0.609,13.662 0.702,13.69 0.793,13.699 0.8,13.699 46.5,13.699 46.559,13.704 46.615,13.722 46.667,13.749 46.713,13.787 46.751,13.833 46.779,13.885 46.796,13.941 46.801,14 46.801,15.999 54.16,15.999 54.219,16.004 54.275,16.021 54.327,16.049 54.373,16.087 54.411,16.133 54.438,16.185 54.456,16.241 54.461,16.3 54.461,24.9 54.456,24.959 54.438,25.015 54.411,25.067 54.373,25.113 54.327,25.151 54.275,25.179 54.219,25.196 54.16,25.201 46.801,25.201 46.801,26.899 80.4,26.899 80.407,26.899

## Other copper
L1-TOP:
  rectangle net GND: 29.5,4.15 30.3,4.45
  rectangle net GND: 67.302,9.075 68.1,9.873
  rectangle net GND: 32.1,11.1 33.425,12.15
  rectangle net GND: 71.4,23.1 73,23.9
  rectangle net GND: 73.6,23.1 75.2,23.9
L4-BOT:
  rectangle net GND: 67.375,9.175 68,9.775
  region net 5V: 80.8,15.6 80.8,13.8 79.9,13.8 77.9,15.8 77.9,16.7 80.762,16.7 80.8,16.662

## Silkscreen, mask and mechanical layers (free items; w line width, h text height)
Top Overlay:
  lines w0.2: 90.285,12.4 90.285,13 ; 90.885,11 91.36,11
  text "1" at 2.575,9.9 h1.2
  text "1" at 115.275,9.425 h1.2
  text "Leap Motion" at 61.2,2 h0.6
  text "0084 - AR Display 2.1" at 61.1,0.8 h0.6
Board Outline:
  the board outline again, w0.2
Sheet Board & Title Block:
  lines w0.152: -34.31,-114.36 -31.77,-111.82 ; -34.31,165.04 -31.77,162.5 ; -31.77,136.846 45.7,136.846 ; -31.77,144.212 45.7,144.212 ; -31.77,151.578 45.7,151.578 ; -31.77,158.69 45.7,158.69 ; 30.333,129.48 30.333,162.5 ; 38.08,129.48 38.08,162.5 ; 283.19,-111.82 283.19,-90.23 308.59,-90.23 394.95,-90.23 ; 283.19,-108.01 308.59,-108.01 ; 283.19,-103.565 308.59,-103.565 ; 283.19,-99.12 308.59,-99.12 342.88,-99.12 ; 283.19,-94.675 308.59,-94.675 342.88,-94.675 ; 297.16,-111.82 297.16,-90.23 ; 308.59,-111.82 308.59,-69.91 394.95,-69.91 ; 308.59,-81.34 394.95,-81.34 ; 311.13,-102.295 340.34,-102.295 ; 317.48,158.69 394.95,158.69 ; 317.48,162.5 317.48,125.5 394.95,125.5 ; 330.18,-90.23 330.18,-81.34 ; 342.88,-111.82 342.88,-90.23 ; 349.23,-90.23 349.23,-81.34 ; 361.295,125.5 361.295,162.5 ; 379.71,-90.23 379.71,-81.34 ; 387.33,125.6 387.33,162.5 ; 394.95,-1.33 397.49,-1.33 ; 397.49,-114.36 394.95,-111.82 ; 397.49,165.04 394.95,162.5 ; -31.77,-111.82 394.95,-111.82 ; -31.77,-111.82 -31.77,162.5 ; -31.77,162.5 394.95,162.5 ; -31.77,162.5 45.7,162.5 45.7,129.48 -31.77,129.48 -31.77,162.5 ; 394.95,-111.82 394.95,162.5
  lines w0.254: -34.31,-114.36 397.49,-114.36 397.49,165.04 -34.31,165.04 -34.31,-114.36
  lines w1.016: 348.595,-94.04 348.595,-108.01 356.215,-108.01 ; 361.295,-101.025 365.105,-101.025 ; 366.375,-108.01 358.755,-108.01 358.755,-94.04 366.375,-94.04 ; 368.915,-108.01 373.995,-94.04 379.075,-108.01 ; 372.725,-102.295 375.265,-102.295 ; 381.615,-108.01 381.615,-94.04 386.695,-94.04 cw(c386.695,-97.106) 388.863,-94.938 cw(c387.965,-95.836) 389.235,-95.836 389.235,-98.594 cw(c387.965,-98.594) 388.863,-99.492 cw(c386.695,-97.324) 386.695,-100.39 381.615,-100.39
  text "Layer / Function" at 327.64,159.96 h1.52
  text "File Name" at 368.915,159.96 h1.52
  text "EXT." at 389.235,159.96 h1.52
  text "ECO Change Description" at -16.53,159.706 h1.52
  text "Date" at 31.476,159.706 h1.52
  text "Rev." at 39.35,159.706 h1.52
  text "Top Solder:" at 344.963,156.15 h1.52
  text ".DwgNo" at 370.566,156.15 h1.52
  text ".GTS" at 388.6,156.15 h1.52
  text "Top Paste:" at 346.487,153.61 h1.52
  text ".DwgNo" at 370.566,153.61 h1.52
  text ".GTP" at 388.6,153.61 h1.52
  text "Top Overlay:" at 343.439,151.07 h1.52
  text ".DwgNo" at 370.566,151.07 h1.52
  text ".GTO" at 388.6,151.07 h1.52
  text ".DwgNo" at 370.566,148.53 h1.52
  text ".GTL" at 388.6,148.53 h1.52
  text "L1(TOP):" at 349.8,148.5 h1.52
  text "8/16/2018" at 31.168,146.928 h0.76
  text "2.1" at 40.012,146.674 h1.52
  text "L2(GND):" at 349.779,146.095 h1.52
  text ".DwgNo" at 370.595,146.085 h1.52
  text ".GP1" at 388.629,146.085 h1.52
  text "L3(GND):" at 349.779,143.695 h1.52
  text ".DwgNo" at 370.595,143.645 h1.52
  text ".GP2" at 388.629,143.645 h1.52
  text "3/18/2018" at 31.168,139.928 h0.76
  text "2.0" at 40.312,139.674 h1.52
  text ".DwgNo" at 370.566,136.81 h1.52
  text ".GBL" at 388.6,136.81 h1.52
  text "L4(BOT):" at 349.8,136.7 h1.52
  text "Bottom Overlay:" at 339.375,134.27 h1.52
  text ".DwgNo" at 370.566,134.27 h1.52
  text ".GBO" at 388.6,134.27 h1.52
  text "7/19/2017" at 30.968,132.528 h0.76
  text "1.0" at 40.112,132.274 h1.52
  text "Bottom Paste:" at 342.423,131.73 h1.52
  text ".DwgNo" at 370.566,131.73 h1.52
  text ".GBP" at 388.6,131.73 h1.52
  text "Bottom Solder:" at 340.899,129.19 h1.52
  text ".DwgNo" at 370.566,129.19 h1.52
  text ".GBS" at 388.6,129.19 h1.52
  text "Mechanical 1 / Board Outline:" at 318.801,126.65 h1.52
  text ".DwgNo" at 370.566,126.65 h1.52
  text ".GM1" at 388.6,126.65 h1.52
  text ".DwgTitle" at 321.29,-77.53 h3.81
  text "SIZE" at 316.21,-83.88 h1.52
  text "CAGE CODE" at 333.355,-83.88 h1.52
  text "DWG NO." at 359.39,-83.88 h1.52
  text "REV." at 384.79,-83.88 h1.52
  text "Tabloid" at 311.13,-88.96 h2.54
  text ".CageCode" at 333.99,-88.96 h2.54
  text ".DwgNo" at 354.31,-88.96 h3.05
  text ".Revision" at 383.52,-88.96 h3.05
  text "APPROVALS" at 285.73,-93.024 h1.02
  text "DATE" at 300.97,-93.024 h1.02
  text "SHEET NO.:" at 309.86,-93.405 h1.52
  text "1" at 327.005,-93.405 h1.52
  text "OF" at 330.815,-93.405 h1.52
  text "1" at 335.895,-93.405 h1.52
  text "ENGINEER:" at 283.825,-95.945 h0.76
  text ".Engineer" at 283.825,-97.85 h0.76
  text "8/16/2018" at 300.335,-97.85 h0.76
  text "SCH NO.:" at 309.86,-97.85 h1.52
  text ".SchNo" at 327.005,-97.85 h1.52
  text "CHECKED BY:" at 283.825,-100.39 h0.76
  text "CONFIDENTIALITY NOTICE" at 314.94,-101.66 h1.02
  text ".CheckedBy" at 283.825,-102.295 h0.76
  text ".CheckedByDate" at 300.335,-102.295 h0.76
  text "This drawing is confidential and contains" at 310.495,-104.2 h0.76
  text "DRAWN BY:" at 283.825,-104.835 h0.76
  text "proprietary information and intellectual" at 310.495,-105.47 h0.76
  text ".DrawnBy" at 283.825,-106.74 h0.76
  text "8/16/2018" at 300.335,-106.74 h0.76
  text "property. Any of the information contained" at 310.495,-106.74 h0.76
  text "herein may not be reproduced or disclosed" at 310.495,-108.01 h0.76
  text "ISSUED:" at 283.825,-109.28 h0.76
  text "without authorization by LEAP Motion." at 310.495,-109.28 h0.76
  text ".Issued" at 283.825,-111.185 h0.76
  text "8/16/2018" at 300.335,-111.185 h0.76
Fabrication Notes:
  lines w0.1: 173.134,91.17 297.3,91.17 ; 173.134,94.98 297.3,94.98 ; 173.134,99.425 297.3,99.425 ; 173.134,103.235 297.3,103.235 ; 173.134,107.045 297.3,107.045 ; 173.134,111.49 297.3,111.4 ; 201.074,87.36 201.074,115.935 ; 224.569,87.36 224.569,115.935 ; 266.479,87.36 266.479,115.935 ; 173.134,115.935 173.134,121.015 297.3,121.015 297.3,115.935 ; 173.134,115.935 297.3,115.935 ; 173.134,115.935 173.134,87.36 297.3,87.36 297.3,115.935
  lines w0.152: 172.827,74.464 391.267,74.464
  text "Impedance Stackup" at 174.632,117.179 h2.54
  text "Layer Name" at 174.632,113.115 h1.52
  text "Copper Weight" at 202.09,113.115 h1.52
  text "Impedance" at 225.864,113.115 h1.52
  text "Trace Width/Space" at 267.393,113.115 h1.52
  text "0.0762mm / 0.0762mm" at 268.5,108.4 h1.52
  text "L1" at 185.339,108.2 h1.52
  text "0.5oz" at 209.339,108.2 h1.52
  text "100 Ohm (+/- 10%)" at 234.339,108.2 h1.52
  text "0.0762mm / 0.0762mm" at 268.5,104.3 h1.52
  text "L4" at 185.339,104.2 h1.52
  text "0.5oz" at 209.339,104.2 h1.52
  text "100 Ohm (+/- 10%)" at 234.339,104.2 h1.52
  text "FABRICATION NOTES" at 172.827,77.004 h2.54
  text "General:" at 175.367,70.654 h1.52
  text "1. Fabricate PCB in accordance with IPC-6012,        ; per IPC-6011." at 185.527,68.114 h1.52
  text ".IPCclass" at 252.837,68.114 h1.52
  text "2. Board assembler shall adjust solder mask and solder stencil to achieve J-STD-001 and IPC-A-610,        , rating." at 185.527,65.574 h1.52
  text ".IPCclass" at 331.577,65.574 h1.52
  text "Materials:" at 175.367,57.954 h1.52
  text "3. Laminate and Prepreg (B-stage) to be in accordance with IPC-4101/99 (RoHS Compliant UL/ANSI FR-4/99)." at 185.527,55.414 h1.52
  text "4. Copper foil to be in accordance with IPC-MF-150.  Unless otherwise specified, all copper weight for inner signal layers and inner plane" at 185.527,52.874 h1.52
  text "layers to be        For outer layers       Copper weight is to be considered 'finished'." at 190.1,50.4 h1.52
  text ".InnerCopperWeight" at 208.9,50.4 h1.52
  text ".OuterCopperWeight" at 245.9,50.3 h1.52
  text "5. Fabricator to adjust dielectric to meet impedance and overall thickness tolerance." at 185.527,47.794 h1.52
  text "Drill Holes and Slots:" at 175.367,40.174 h1.52
  text "6. All hole and slot sizes specified are finished size (after plating)." at 185.527,37.634 h1.52
  text "7. Holes under 7mil shall be within 0.003'' of the specified hole size, unless otherwise specified in the drill table." at 185.527,35.094 h1.52
  text "Finish:" at 175.697,27.592 h1.52
  text "8. Shall be plated with Electroless Nickel Immersion Gold (ENIG) per IPC-4552." at 185.527,24.934 h1.52
  text "9. Apply liquid photo imageable solder mask (color              ).  Via holes covered with solder mask do not need to be plugged." at 185.527,22.394 h1.52
  text ".BoardColor" at 261.346,22.292 h1.52
  text "10. Silkscreen shall be White, permanent, non conductive ink.  There shall be no silkscreen on any solderable component pad." at 185.527,19.854 h1.52
  text "11. Overall board thickness shall be        +/- 10% and is inclusive of all plating and solder mask coatings." at 185.527,17.314 h1.52
  text ".BoardThickness" at 240.6,17.3 h1.52
  text "Marking:" at 174.427,8.898 h1.52
  text "12. UL logo, manufacturer's identification and date code letter shall be  rendered in etch on the bottom side of the board" at 184.282,5.884 h1.52
  text "approximately where shown." at 191.902,3.344 h1.52
  text "Test Requirements:" at 174.122,-4.276 h1.52
  text "13. 100% net list electrical verification using customer supplied IPC-D-356 net list for opens and shorts." at 184.282,-6.816 h1.52
  text "14. No changes shall be made without LEAP Motion's consent, unless stated otherwise." at 184.3,-10 h1.52
Assembly Notes:
  lines w0.152: 172.827,-28.406 391.267,-28.406
  text "ASSEMBLY NOTES" at 172.827,-25.866 h2.54
  text "1.  This drawing is CAD generated.  No changes shall be made without LEAP Motion's consent." at 185.527,-33.486 h1.52
  text "2.  Use only no-clean RoHS compliant solder." at 185.527,-36.026 h1.52
  text "3.  Assemble and solder per J-STD-001, Class 2." at 185.527,-38.566 h1.52
  text "4.  Prior to shipment, each assembly must be packaged seperately in a static shielding bag in a manner that protects from physical damage." at 185.527,-41.106 h1.52
  text "5.  Inspect to IPC-A-610, Class 2." at 185.527,-43.646 h1.52
  text "6.  DFM report is required for all first article builds." at 185.527,-46.186 h1.52
  text "7.  Board revision shall be written/labeled in the space provided on the board." at 185.527,-48.726 h1.52
Drill Drawing:
  text ".LEGEND" at -29.23,-106.105 h1.52
  text "Drill Drawing." at -29.23,-109.28 h1.52

## Dimensions
81.2,26.4 to 127.7,13.2 on Dimensions
0,13.2 to 46.5,27.2 on Dimensions
127.7,14 to 127.7,0 on Dimensions
0,0 to 127.7,0 on Dimensions
81.15,27.2 to 81.15,14 on Dimensions
46.56,27.2 to 46.56,24.9 on Dimensions
46.55,14 to 54.16,16.3 on Dimensions